# EAGLE board BOARD (EAGLE 9.7.0)
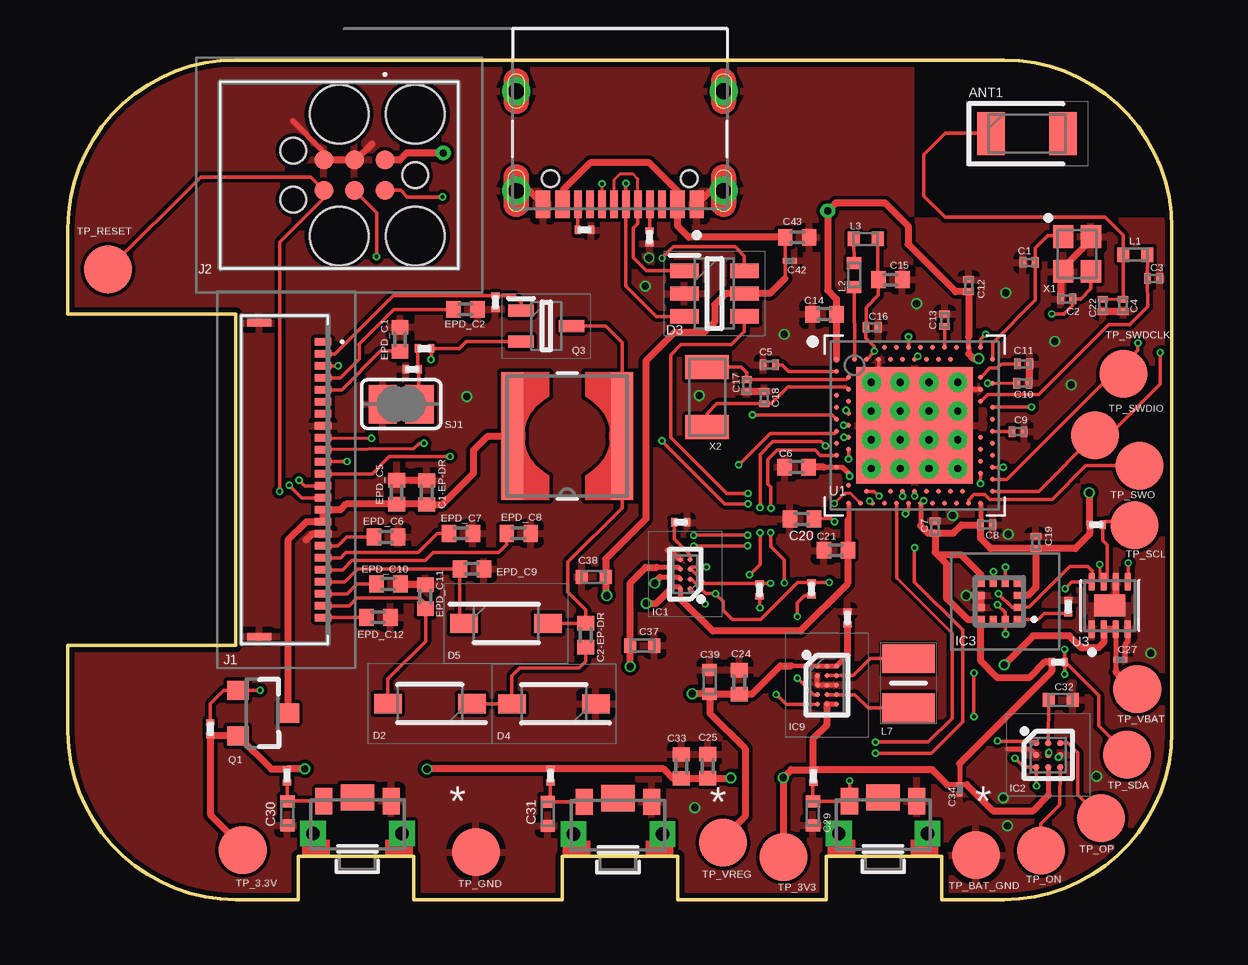
[diagram p0: board, top side]
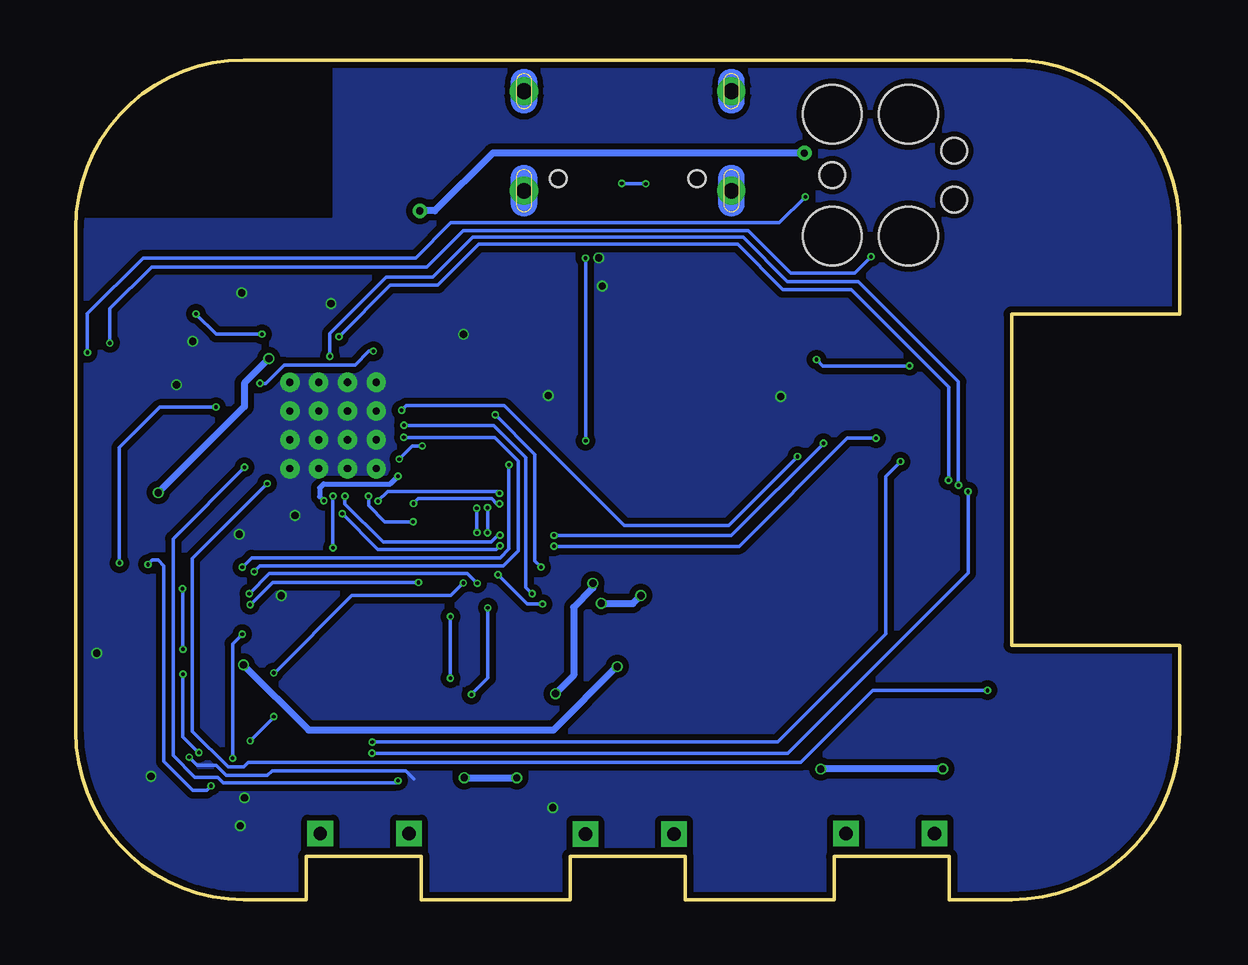
[diagram p1: board, bottom side, seen from below]

Size 46 x 35 mm. Coordinates in mm from the lower left corner, seen from the top.
Outline: 39,0 36.4,0 36.4,1.8 31.6,1.8 31.6,0 25.4,0 25.4,1.8 20.6,1.8 20.6,0 14.4,0 14.4,1.8 9.6,1.8 9.6,0 7,0 arc-90 0,7 0,10.6 7,10.6 7,24.4 0,24.4 0,28 arc-90 7,35 39,35 arc-90 46,28 46,7 arc-90 39,0
Copper layers (1*16): Top 0.035mm / dielectric 1.6mm / Bottom 0.035mm
Design rules "jlcpcb-2layers.dru": minimum track width 5mil, minimum drill 0.15mm, track to track 5mil, track to pad 5mil, pad to pad 5mil, via to via 5mil, smd to smd 5mil, copper to edge 0.2mm, drill to drill 6mil, minimum pad ring 10mil, minimum via ring 3mil, stop-mask expansion 4mil, vias tented up to drill 0mil, thermal gap 10mil

## Footprints (pad centres in the part's own frame; a part is rotated, then mirrored left to right if it is on the bottom)
2450AT18B100E_ANTC3216X140N = smd 1.15 x 1.8: 1 -1.5,0; 2 1.5,0
NORDIC_NRF_3_RESC0201_L = smd 0.28 x 0.43: 1 -0.255,0; 2 0.255,0
PERFECT_0402_0402 = smd 0.6 x 0.7: 1 -0.5,0; 2 0.5,0
GRM011R60J152KE01L_1_0201 = smd 0.35 x 0.25: 1 0,0.275; 2 0,-0.275
GRM011R60J152KE01L_2_CAPC0201X13N = smd 0.22 x 0.23: 1 -0.185,0; 2 0.185,0
NORDIC_NRF_3_RESC0402_L = smd 0.5 x 0.6: 1 -0.5,0; 2 0.5,0
ESP32_C6_LIBRARY_5_SOD3716X135N = smd 1.15 x 0.8: 1 -1.75,0; 2 1.75,0
ESP32_C6_LIBRARY_3_SOT95P280X145-6N = smd 1.2 x 0.6: 1 -1.25,0.95; 2 -1.25,0; 3 -1.25,-0.95; 4 1.25,-0.95; 5 1.25,0; 6 1.25,0.95
BQ25180YBGR_BGA8C40P2X4_100X155X50 = smd 0.2 x 0.2: A1 -0.2,0.6; A2 0.2,0.6; B1 -0.2,0.2; B2 0.2,0.2; C1 -0.2,-0.2; C2 0.2,-0.2; D1 -0.2,-0.6; D2 0.2,-0.6
DRV2605YZFR_BGA9C50P3X3_144X144X62 = smd 0.25 x 0.25: A1 -0.5,0.5; A2 0,0.5; A3 0.5,0.5; B1 -0.5,0; B2 0,0; B3 0.5,0; C1 -0.5,-0.5; C2 0,-0.5; C3 0.5,-0.5
BMA423_BMA423 = smd 0.3 x 0.35: 1 -0.75,-0.775; 2 -0.25,-0.775; 3 0.25,-0.775; 4 0.75,-0.775; 7 0.75,0.775; 8 0.25,0.775; 9 -0.25,0.775; 10 -0.75,0.775 | smd 0.35 x 0.3: 5 0.775,-0.25; 6 0.775,0.25; 11 -0.775,0.25; 12 -0.775,-0.25
RT6160AWSC_BGA15C40P3X5_140X230X60 = smd 0.216 x 0.216: A1 -0.4,0.8; A2 0,0.8; A3 0.4,0.8; B1 -0.4,0.4; B2 0,0.4; B3 0.4,0.4; C1 -0.4,0; C2 0,0; C3 0.4,0; D1 -0.4,-0.4; D2 0,-0.4; D3 0.4,-0.4; E1 -0.4,-0.8; E2 0,-0.8; E3 0.4,-0.8
503480-2400_5034802400 = smd 0.3 x 0.7: 1 -5.75,1.525; 2 -5.25,1.525; 3 -4.75,1.525; 4 -4.25,1.525; 5 -3.75,1.525; 6 -3.25,1.525; 7 -2.75,1.525; 8 -2.25,1.525; 9 -1.75,1.525; 10 -1.25,1.525; 11 -0.75,1.525; 12 -0.25,1.525; 13 0.25,1.525; 14 0.75,1.525; 15 1.25,1.525; 16 1.75,1.525; 17 2.25,1.525; 18 2.75,1.525; 19 3.25,1.525; 20 3.75,1.525; 21 4.25,1.525; 22 4.75,1.525; 23 5.25,1.525; 24 5.75,1.525 | smd 0.3 x 1: MP1 -6.54,-1.125; MP2 6.54,-1.125
TC2030-IDC_TC2030IDC = smd 0.783 x 0.783: 1 -0.953,-0.635; 2 -0.953,0.635; 3 0.317,-0.635; 4 0.317,0.635; 5 1.588,-0.635; 6 1.588,0.635 | hole 2.451: -2.223,-2.54; -2.223,2.54; 0.952,-2.54; 0.952,2.54 | hole 1.067: -2.223,0; 2.857,-1.016; 2.857,1.016
KH-TYPE-C-16P_KINGHELM_KH-TYPE-C-16P = smd 0.6 x 1.15: A1_B12 -3.2,4.725; A4_B9 -2.4,4.725; A9_B4 2.4,4.725; A12_B1 3.2,4.725 | smd 0.3 x 1.15: A5 -1.25,4.725; A6 -0.25,4.725; A7 0.25,4.725; A8 1.25,4.725; B5 1.75,4.725; B6 0.75,4.725; B7 -0.75,4.725; B8 -1.75,4.725 | drill 0.65 pad 1.05: SH1 -4.32,0; SH2 4.32,0; SH3 -4.32,4.15; SH4 4.32,4.15 | hole 0.7: -2.89,3.65; 2.89,3.65
NORDIC_NRF_2_RESC0402_L = smd 0.5 x 0.6: 1 -0.5,0; 2 0.5,0
ESP32_C6_LIBRARY_2_IND_4828-WE-TPC_WRE = smd 0.9 x 5.3: 1 -2.286,0; 2 2.286,0
MLP2016SR47MT0S1_INDC2016X100N = smd 1.2 x 2.2: 1 -1.028,0; 2 1.028,0
ESP32_C6_LIBRARY_4_ESP32_C6_LIBRARY_4_ESP32_C6_LIBRARY_4_ESP32_C6_LIBRARY_4_ESP32_WROVER_SPARKFUN-DISCRETESEMI_SOT23-3 = smd 0.8 x 0.9: 1 -0.95,-1; 2 0.95,-1; 3 0,1.1
ESP32_C6_LIBRARY_6_SOT65P210X110-3N = smd 1.05 x 0.5: 1 -1.05,0.65; 2 -1.05,-0.65; 3 1.05,0
ERA-1AEB3401C_0201 = smd 0.35 x 0.25: 1 0,0.275; 2 0,-0.275
CPF0201D7K68C1_0201 = smd 0.35 x 0.25: 1 0,0.275; 2 0,-0.275
ESP32_C6_LIBRARY_7_JUMPER_SJ = smd 1.168 x 1.6: 1 -0.762,0; 2 0.762,0
2025-10-22_07-23-44_LIBRARY_SW_EVP-AKE31A_PAN = smd 0.711 x 1.092: 1 -1.4,-0.972; 2 1.4,-0.972 | drill 0.559 pad 0.914 square: 3 -1.848,0.381; 4 1.848,0.381 | smd 1.397 x 1.092: 5 0,-1.124
HECTOR_WATCH_1_TP20R = smd 2 x 2: TP 0,0
NORDIC_NRF_4_AQFN50P700X700X85_HS-74N = smd 4.85 x 4.85: P$74 0,0 | drill 0.3 pad 0.6: P$75 -1.8,1.8; P$76 -0.6,1.8; P$77 0.6,1.8; P$78 1.8,1.8; P$79 -1.8,0.6; P$80 -0.6,0.6; P$81 0.6,0.6; P$82 1.8,0.6; P$83 -1.8,-0.6; P$84 -0.6,-0.6; P$85 0.6,-0.6; P$86 1.8,-0.6; P$87 -1.8,-1.8; P$88 -0.6,-1.8; P$89 0.6,-1.8; P$90 1.8,-1.8 | smd 0.2 x 0.2: P$A8 -1.25,3.25; P$A10 -0.75,3.25; P$A12 -0.25,3.25; P$A14 0.25,3.25; P$A16 0.75,3.25; P$A18 1.25,3.25; P$A20 1.75,3.25; P$A22 2.25,3.25; P$A23 2.75,3.25; P$AA24 3.25,-2.25; P$AB2 -2.75,-2.5; P$AC5 -2,-2.75; P$AC9 -1,-2.75; P$AC11 -0.5,-2.75; P$AC13 0,-2.75; P$AC15 0.5,-2.75; P$AC17 1,-2.75; P$AC19 1.5,-2.75; P$AC21 2,-2.75; P$AC24 3.25,-2.75; P$AD2 -2.75,-3.25; P$AD4 -2.25,-3.25; P$AD6 -1.75,-3.25; P$AD8 -1.25,-3.25; P$AD10 -0.75,-3.25; P$AD12 -0.25,-3.25; P$AD14 0.25,-3.25; P$AD16 0.75,-3.25; P$AD18 1.25,-3.25; P$AD20 1.75,-3.25; P$AD22 2.25,-3.25; P$AD23 2.75,-3.25; P$B1 -3.25,2.75; P$B3 -2.5,2.75; P$B5 -2,2.75; P$B7 -1.5,2.75; P$B9 -1,2.75; P$B11 -0.5,2.75; P$B13 0,2.75; P$B15 0.5,2.75; P$B17 1,2.75; P$B19 1.5,2.75; P$B24 3.25,2.75; P$C1 -3.25,2.25; P$D2 -2.75,2; P$D23 2.75,2; P$E24 3.25,1.75; P$F2 -2.75,1.5; P$F23 2.75,1.5; P$G1 -3.25,1.25; P$H2 -2.75,1; P$H23 2.75,1; P$J1 -3.25,0.75; P$J24 3.25,0.75; P$K2 -2.75,0.5; P$L1 -3.25,0.25; P$L24 3.25,0.25; P$M2 -2.75,0; P$N1 -3.25,-0.25; P$N24 3.25,-0.25; P$P2 -2.75,-0.5; P$P23 2.75,-0.5; P$R1 -3.25,-0.75; P$R24 3.25,-0.75; P$T2 -2.75,-1; P$T23 2.75,-1; P$U1 -3.25,-1.25; P$U24 3.25,-1.25; P$V23 2.75,-1.5; P$W1 -3.25,-1.75; P$W24 3.25,-1.75; P$Y2 -2.75,-2; P$Y23 2.75,-2
ESP32_C6_LIBRARY_SON50P200X200X80-9N = smd 0.76 x 0.27: 1 -0.985,0.75; 2 -0.985,0.25; 3 -0.985,-0.25; 4 -0.985,-0.75; 5 0.985,-0.75; 6 0.985,-0.25; 7 0.985,0.25; 8 0.985,0.75 | smd 0.9 x 1.3: 9 0,0
NORDIC_NRF_BT-XTAL_2016_N = smd 0.95 x 0.85: 1 -0.725,-0.575; 2 0.725,-0.575; 3 0.725,0.575; 4 -0.725,0.575
NORDIC_NRF_1_XTAL_3215_N = smd 1 x 1.8: 1 -1.25,0; 2 1.25,0

## Placement (x,y rotation side)
ANT1  2450AT18B100E_2450AT18B100E  [2450AT18B100E_ANTC3216X140N]  39.97,31.93 0 top
C1  12pF  [NORDIC_NRF_3_RESC0201_L]  40.05,26.56 180 top
C1-EP-DR  10uF  [PERFECT_0402_0402]  14.95,16.97 90 top
C2  12pF  [NORDIC_NRF_3_RESC0201_L]  41.61,25.04 180 top
C2-EP-DR  4.7uF/25V  [PERFECT_0402_0402]  21.57,11.01 90 top
C3  1pF  [NORDIC_NRF_3_RESC0201_L]  45.23,25.89 0 top
C4  1pF  [NORDIC_NRF_3_RESC0201_L]  43.96,24.77 270 top
C5  100nF  [NORDIC_NRF_3_RESC0201_L]  29.22,22.29 180 top
C6  4.7uF  [PERFECT_0402_0402]  30.36,18.02 180 top
C7  100nF  [NORDIC_NRF_3_RESC0201_L]  36.13,15.53 90 top
C8  100nF  [NORDIC_NRF_3_RESC0201_L]  38.28,15.62 0 top
C9  820pF N.C.  [NORDIC_NRF_3_RESC0201_L]  39.59,19.51 0 top
C10  N.C.  [NORDIC_NRF_3_RESC0201_L]  39.79,21.53 0 top
C11  100pF  [NORDIC_NRF_3_RESC0201_L]  39.82,22.33 0 top
C12  100nF  [NORDIC_NRF_3_RESC0201_L]  37.53,25.59 90 top
C13  N.C.  [NORDIC_NRF_3_RESC0201_L]  36.53,24.15 90 top
C14  4.7uF  [PERFECT_0402_0402]  31.52,24.4 180 top
C15  1.0uF  [PERFECT_0402_0402]  34.27,25.84 0 top
C16  47nF  [NORDIC_NRF_3_RESC0201_L]  33.51,23.85 0 top
C17  12pF  [NORDIC_NRF_3_RESC0201_L]  28.28,21.42 90 top
C18  12pF  [NORDIC_NRF_3_RESC0201_L]  29.01,20.93 270 top
C19  100nF  [NORDIC_NRF_3_RESC0201_L]  40.33,14.89 90 top
C20  4.7uF  [PERFECT_0402_0402]  30.58,15.86 180 top
C21  4.7uF  [PERFECT_0402_0402]  32,14.56 180 top
C22  N.C.  [NORDIC_NRF_3_RESC0201_L]  43.12,24.76 270 top
C23  0.1uF  [GRM011R60J152KE01L_1_0201]  32.48,11.74 0 top
C24  10uF  [PERFECT_0402_0402]  27.97,9.06 270 top
C25  22uF  [PERFECT_0402_0402]  26.66,5.56 90 top
C27  0.1uF  [GRM011R60J152KE01L_2_CAPC0201X13N]  43.85,9.99 180 top
C29  1uF  [NORDIC_NRF_3_RESC0402_L]  31.04,3.6 90 top
C30  1uF  [NORDIC_NRF_3_RESC0402_L]  9.14,3.59 90 top
C31  1uF  [NORDIC_NRF_3_RESC0402_L]  19.99,3.57 90 top
C32  1uF  [NORDIC_NRF_3_RESC0402_L]  41.37,8.32 180 top
C33  22uF  [PERFECT_0402_0402]  25.55,5.55 90 top
C34  0.1uF  [GRM011R60J152KE01L_2_CAPC0201X13N]  37.16,4.59 90 top
C37  1uF  [NORDIC_NRF_3_RESC0402_L]  23.93,10.59 180 top
C38  1uF  [NORDIC_NRF_3_RESC0402_L]  21.91,13.45 0 top
C39  10uF  [NORDIC_NRF_3_RESC0402_L]  26.74,9.07 270 top
C42  0.1uF  [GRM011R60J152KE01L_2_CAPC0201X13N]  30.08,26.63 180 top
C43  4.7uF  [PERFECT_0402_0402]  30.39,27.61 0 top
D2  MBR0530  [ESP32_C6_LIBRARY_5_SOD3716X135N]  15.08,8.17 180 top
D3  USBLC6-2SC6Y  [ESP32_C6_LIBRARY_3_SOT95P280X145-6N]  26.94,25.26 0 top
D4  MBR0530  [ESP32_C6_LIBRARY_5_SOD3716X135N]  20.24,8.16 180 top
D5  MBR0530  [ESP32_C6_LIBRARY_5_SOD3716X135N]  18.25,11.52 0 top
EPD_C1  1uF/50V  [PERFECT_0402_0402]  13.84,23.36 270 top
EPD_C2  1uF/50V  [PERFECT_0402_0402]  16.57,24.6 180 top
EPD_C5  1uF/50V  [PERFECT_0402_0402]  13.69,16.98 270 top
EPD_C6  1uF/50V  [PERFECT_0402_0402]  13.26,15.11 180 top
EPD_C7  1uF/50V  [PERFECT_0402_0402]  16.37,15.26 180 top
EPD_C8  1uF/50V  [PERFECT_0402_0402]  18.79,15.26 180 top
EPD_C9  1uF/50V  [PERFECT_0402_0402]  16.83,13.78 180 top
EPD_C10  1uF/50V  [PERFECT_0402_0402]  13.35,13.16 180 top
EPD_C11  1uF/50V  [PERFECT_0402_0402]  14.9,12.63 270 top
EPD_C12  1uF/50V  [PERFECT_0402_0402]  12.93,11.77 180 top
IC1  BQ25180YBGR  [BQ25180YBGR_BGA8C40P2X4_100X155X50]  25.72,13.56 180 top
IC2  DRV2605YZFR  [DRV2605YZFR_BGA9C50P3X3_144X144X62]  40.85,6.03 0 top
IC3  BMA423  [BMA423_BMA423]  38.81,12.43 90 top
IC9  RT6160AWSC  [RT6160AWSC_BGA15C40P3X5_140X230X60]  31.62,8.94 0 top
J1  503480-2400  [503480-2400_5034802400]  9.1,17.5 270 top
J2  TC2030-IDC  [TC2030-IDC_TC2030IDC]  12.25,30.2 180 top
J4  KH-TYPE-C-16P  [KH-TYPE-C-16P_KINGHELM_KH-TYPE-C-16P]  23,33.7 180 top
L1  3.9nH  [NORDIC_NRF_2_RESC0402_L]  44.47,26.88 180 top
L2  10uH  [NORDIC_NRF_2_RESC0402_L]  32.76,26.02 90 top
L3  15nH  [NORDIC_NRF_2_RESC0402_L]  33.25,27.54 0 top
L5  68 uH  [ESP32_C6_LIBRARY_2_IND_4828-WE-TPC_WRE]  20.8,19.32 180 top
L7  FTC252012SR47MBCA  [MLP2016SR47MT0S1_INDC2016X100N]  35.02,9.02 270 top
Q1  DMG2305UX-7 20V/4.2A/52mΩ/1.4W  [ESP32_C6_LIBRARY_4_ESP32_C6_LIBRARY_4_ESP32_C6_LIBRARY_4_ESP32_C6_LIBRARY_4_ESP32_WROVER_SPARKFUN-DISCRETESEMI_SOT23-3]  8.08,7.77 270 top
Q3  SI1308EDL-T1-GE3  [ESP32_C6_LIBRARY_6_SOT65P210X110-3N]  19.93,23.91 0 top
R1_EP_DR  0.47  [ERA-1AEB3401C_0201]  14.86,22.97 90 top
R1_USB  5K1  [CPF0201D7K68C1_0201]  24.23,27.62 180 top
R2  0  [ERA-1AEB3401C_0201]  28.82,12.91 0 top
R2_EP_DR  10K  [ERA-1AEB3401C_0201]  17.81,24.9 180 top
R2_USB  5K1  [CPF0201D7K68C1_0201]  21.52,27.91 90 top
R3  0  [CPF0201D7K68C1_0201]  41.68,12.21 0 top
R4  0  [ERA-1AEB3401C_0201]  30.99,12.95 0 top
R5  10k  [CPF0201D7K68C1_0201]  9.13,5.17 180 top
R7  10k  [CPF0201D7K68C1_0201]  31.06,5.13 180 top
R8  10k  [CPF0201D7K68C1_0201]  20.11,5.17 180 top
R9  10K  [ERA-1AEB3401C_0201]  25.53,15.73 270 top
R17  3K3  [ERA-1AEB3401C_0201]  42.85,15.63 90 top
R18  3K3  [ERA-1AEB3401C_0201]  41.26,9.9 90 top
R_PWR_EPD  10K  [CPF0201D7K68C1_0201]  5.93,7.12 0 top
R_TYPE_SEL  2.2  [ERA-1AEB3401C_0201]  14.35,22.11 90 top
SJ1  0  [ESP32_C6_LIBRARY_7_JUMPER_SJ]  13.89,20.65 0 top
SW_DN  2025-10-22_07-23-44_LIBRARY_EVP-AKE31ASW_EVP-AKE31A_PAN  [2025-10-22_07-23-44_LIBRARY_SW_EVP-AKE31A_PAN]  33.96,3.13 180 top
SW_ENT  2025-10-22_07-23-44_LIBRARY_EVP-AKE31ASW_EVP-AKE31A_PAN  [2025-10-22_07-23-44_LIBRARY_SW_EVP-AKE31A_PAN]  22.92,3.1 180 top
SW_UP  2025-10-22_07-23-44_LIBRARY_EVP-AKE31ASW_EVP-AKE31A_PAN  [2025-10-22_07-23-44_LIBRARY_SW_EVP-AKE31A_PAN]  12.06,3.14 180 top
TP_3.3V  HECTOR_WATCH_1_TPTP20R  [HECTOR_WATCH_1_TP20R]  7.28,2.07 0 top
TP_3V3  HECTOR_WATCH_1_TPTP20R  [HECTOR_WATCH_1_TP20R]  29.81,1.78 0 top
TP_BAT_GND  HECTOR_WATCH_1_TPTP20R  [HECTOR_WATCH_1_TP20R]  37.83,1.85 0 top
TP_GND  HECTOR_WATCH_1_TPTP20R  [HECTOR_WATCH_1_TP20R]  16.99,1.98 0 top
TP_ON  HECTOR_WATCH_1_TPTP20R  [HECTOR_WATCH_1_TP20R]  40.54,2.04 0 top
TP_OP  HECTOR_WATCH_1_TPTP20R  [HECTOR_WATCH_1_TP20R]  43.04,3.4 0 top
TP_RESET  HECTOR_WATCH_1_TPTP20R  [HECTOR_WATCH_1_TP20R]  1.67,26.26 180 top
TP_SCL  HECTOR_WATCH_1_TPTP20R  [HECTOR_WATCH_1_TP20R]  44.45,15.61 0 top
TP_SDA  HECTOR_WATCH_1_TPTP20R  [HECTOR_WATCH_1_TP20R]  44.13,6.04 0 top
TP_SWDCLK  HECTOR_WATCH_1_TPTP20R  [HECTOR_WATCH_1_TP20R]  43.98,21.92 0 top
TP_SWDIO  HECTOR_WATCH_1_TPTP20R  [HECTOR_WATCH_1_TP20R]  42.79,19.36 0 top
TP_SWO  HECTOR_WATCH_1_TPTP20R  [HECTOR_WATCH_1_TP20R]  44.66,18.09 0 top
TP_VBAT  HECTOR_WATCH_1_TPTP20R  [HECTOR_WATCH_1_TP20R]  44.55,8.76 0 top
TP_VREG  HECTOR_WATCH_1_TPTP20R  [HECTOR_WATCH_1_TP20R]  27.29,2.38 0 top
U1  NRF52840_QF  [NORDIC_NRF_4_AQFN50P700X700X85_HS-74N]  35.28,19.77 0 top
U3  MAX17048G+T10  [ESP32_C6_LIBRARY_SON50P200X200X80-9N]  43.41,12.26 90 top
X1  32MHz  [NORDIC_NRF_BT-XTAL_2016_N]  42.05,26.91 270 top
X2  32.768kHz  [NORDIC_NRF_1_XTAL_3215_N]  26.63,20.94 270 top

## Library data of the parts
ANT1 = InkTime_v5.lbr; ARROW_PART_NUMBER: 2450AT18B100E; ARROW_PRICE-STOCK: https://www.arrow.com/en/products/2450at18b100e/johanson-dielectrics?utm_currency=USD&region=nac; DESCRIPTION: Antennas 2.45GHz ANTENNA; HEIGHT: 1.4mm; MANUFACTURER_NAME: JOHANSON TECHNOLOGY; MANUFACTURER_PART_NUMBER: 2450AT18B100E; MOUSER_PART_NUMBER: 609-2450AT18B100E; MOUSER_PRICE-STOCK: https://www.mouser.co.uk/ProductDetail/Johanson-Technology/2450AT18B100E?qs=yCnrNFeXz%252Bh5MFsFIXGZGA%3D%3D
C1 C1-EP-DR C2 C2-EP-DR C3-C25 C29-C33 C37-C39 C43 EPD_C1 EPD_C2 EPD_C5-EPD_C12 L1-L3 R1_EP_DR R1_USB R2 R2_EP_DR R2_USB R3-R5 R7-R9 R17 R18 R_PWR_EPD R_TYPE_SEL SJ1 TP_3.3V TP_3V3 TP_BAT_GND TP_GND TP_ON TP_OP TP_RESET TP_SCL TP_SDA TP_SWDCLK TP_SWDIO TP_SWO TP_VBAT TP_VREG U1 X1 X2 = InkTime_v5.lbr
C27 C34 C42 = InkTime_v5.lbr; AVAILABILITY: In Stock; CHECK_PRICES: https://www.snapeda.com/parts/GRM011R60J152KE01L/Murata/view-part/?ref=eda; DESCRIPTION: SMD Capacitor X5R(EIA) with Capacitance: 1500pF Tol. 10%. Rated Voltage: 6.3Vdc; MF: Murata; MP: GRM011R60J152KE01L; PACKAGE: 0201 Murata; PRICE: None; SNAPEDA_LINK: https://www.snapeda.com/parts/GRM011R60J152KE01L/Murata/view-part/?ref=snap
D2 D4 D5 = InkTime_v5.lbr; AVAILABILITY: In Stock; CHECK_PRICES: https://www.snapeda.com/parts/MBR0530/Onsemi/view-part/?ref=eda; DESCRIPTION: Diode Schottky 30 V 500mA Surface Mount SOD-123; MF: ON Semiconductor; MP: MBR0530; PACKAGE: SOD-123-2 ON Semiconductor; PRICE: None; PURCHASE-URL: https://www.snapeda.com/api/url_track_click_mouser/?unipart_id=179458&manufacturer=ON Semiconductor&part_name=MBR0530&search_term=None; SNAPEDA_LINK: https://www.snapeda.com/parts/MBR0530/Onsemi/view-part/?ref=snap
D3 = InkTime_v5.lbr; AVAILABILITY: In Stock; CHECK_PRICES: https://www.snapeda.com/parts/USBLC6-2SC6Y/STMicroelectronics/view-part/?ref=eda; DESCRIPTION: 17V Clamp 5A (8/20µs) Ipp Tvs Diode Surface Mount SOT-23-6; MF: STMicroelectronics; MP: USBLC6-2SC6Y; PACKAGE: SOT-23-6 STMicroelectronics; PRICE: None; SNAPEDA_LINK: https://www.snapeda.com/parts/USBLC6-2SC6Y/STMicroelectronics/view-part/?ref=snap
IC1 = InkTime_v5.lbr; ARROW_PART_NUMBER: BQ25180YBGR; ARROW_PRICE-STOCK: https://www.arrow.com/en/products/bq25180ybgr/texas-instruments?utm_currency=USD&region=nac; DESCRIPTION: Charger IC Lithium Ion/Polymer, Lithium Iron Phosphate 8-DSBGA (1.6x1.1); HEIGHT: 0.5mm; MANUFACTURER_NAME: Texas Instruments; MANUFACTURER_PART_NUMBER: BQ25180YBGR; MOUSER_PART_NUMBER: 595-BQ25180YBGR; MOUSER_PRICE-STOCK: https://www.mouser.co.uk/ProductDetail/Texas-Instruments/BQ25180YBGR?qs=doiCPypUmgEWjAK%252BJAX6Tw%3D%3D
IC2 = InkTime_v5.lbr; ARROW_PART_NUMBER: DRV2605YZFR; ARROW_PRICE-STOCK: https://www.arrow.com/en/products/drv2605yzfr/texas-instruments?region=nac; DESCRIPTION: Haptic Driver for ERM/LRA with Built-In Library and Smart Loop Architecture; HEIGHT: 0.625mm; MANUFACTURER_NAME: Texas Instruments; MANUFACTURER_PART_NUMBER: DRV2605YZFR
IC3 = InkTime_v5.lbr; ARROW_PART_NUMBER: BMA423; ARROW_PRICE-STOCK: https://www.arrow.com/en/products/bma423/bosch; DESCRIPTION: Accelerometers Triaxial low-g 12bit Acceleration Sensor; HEIGHT: 1mm; MANUFACTURER_NAME: BOSCH; MANUFACTURER_PART_NUMBER: BMA423; MOUSER_PART_NUMBER: 262-BMA423; MOUSER_PRICE-STOCK: https://www.mouser.co.uk/ProductDetail/Bosch-Sensortec/BMA423?qs=HXFqYaX1Q2xC%252BSgeGoX3mg%3D%3D
IC9 = InkTime_v5.lbr; DESCRIPTION: Buck-Boost Regulator Positive Output Step-Up/Step-Down I2C DC-DC Controller IC 15-WL-CSP (BSC) (1.4x2.3); HEIGHT: 0.6mm; MANUFACTURER_NAME: RICHTEK; MANUFACTURER_PART_NUMBER: RT6160AWSC; MOUSER_PART_NUMBER: 835-RT6160AWSC; MOUSER_PRICE-STOCK: https://www.mouser.co.uk/ProductDetail/Richtek/RT6160AWSC?qs=amGC7iS6iy%2FLd9PSoixZXQ%3D%3D
J1 = InkTime_v5.lbr; DESCRIPTION: FFC & FPC Connectors 0.5mm FPC RA SMT Dual Contact 24Ckt; HEIGHT: 1.87mm; MANUFACTURER_NAME: Molex; MANUFACTURER_PART_NUMBER: 503480-2400; MOUSER_PART_NUMBER: 538-503480-2400; MOUSER_PRICE-STOCK: https://www.mouser.co.uk/ProductDetail/Molex/503480-2400?qs=OAhjpuo3Vu7efIoxFh9AOw%3D%3D
J2 = InkTime_v5.lbr; DESCRIPTION: CABLE ADAPTER 6 POS; HEIGHT: 19mm; MANUFACTURER_NAME: Tag Connect; MANUFACTURER_PART_NUMBER: TC2030-IDC
J4 = InkTime_v5.lbr; AVAILABILITY: Not in stock; CHECK_PRICES: https://www.snapeda.com/parts/KH-TYPE-C-16P/Kinghelm/view-part/?ref=eda; MF: kinghelm; MP: KH-TYPE-C-16P; PACKAGE: None; PRICE: None; SNAPEDA_LINK: https://www.snapeda.com/parts/KH-TYPE-C-16P/Kinghelm/view-part/?ref=snap
L5 = InkTime_v5.lbr; COPYRIGHT: Copyright (C) 2024 Ultra Librarian. All rights reserved.; MANUFACTURER_PART_NUMBER: 744043680; MFR_NAME: Wurth Electronics
L7 = InkTime_v5.lbr; DESCRIPTION: SMD / SMT Inductors (Coils), L=0.47?H, L x W x T :; HEIGHT: 1mm; JLCPCB: https://jlcpcb.com/partdetail/6763488-FTC252012SR47MBCA/C5832368; MANUFACTURER_NAME: TDK; MANUFACTURER_PART_NUMBER: FTC252012SR47MBCA
Q1 = InkTime_v5.lbr; PROD_ID: TRAN-14388
Q3 = InkTime_v5.lbr; AVAILABILITY: In Stock; CHECK_PRICES: https://www.snapeda.com/parts/SI1308EDL-T1-GE3/Vishay+Siliconix/view-part/?ref=eda; DESCRIPTION: Si1308EDL-T1-GE3 N-channel MOSFET Transistor, 1.5 A, 30 V, 3-Pin SC-70 | Siliconix / Vishay SI1308EDL-T1-GE3; MF: Vishay Siliconix; MP: SI1308EDL-T1-GE3; PACKAGE: SOT-323 Vishay Semiconductor; PRICE: None; PURCHASE-URL: https://www.snapeda.com/api/url_track_click_mouser/?unipart_id=274603&manufacturer=Vishay Siliconix&part_name=SI1308EDL-T1-GE3&search_term=None; SNAPEDA_LINK: https://www.snapeda.com/parts/SI1308EDL-T1-GE3/Vishay+Siliconix/view-part/?ref=snap
SW_DN SW_ENT SW_UP = InkTime_v5.lbr; COPYRIGHT: Copyright (C) 2025 Ultra Librarian. All rights reserved.; DIGI-KEY_PART_NUMBER_1: P123437TR-ND; DIGI-KEY_PART_NUMBER_2: P123437CT-ND; DIGI-KEY_PART_NUMBER_3: P123437DKR-ND; MANUFACTURER_NAME: Panasonic; MANUFACTURER_PART_NUMBER: EVP-AKE31A
U3 = InkTime_v5.lbr; AVAILABILITY: In Stock; CHECK_PRICES: https://www.snapeda.com/parts/MAX17048G+T10/Analog+Devices/view-part/?ref=eda; DESCRIPTION: 3µA 1-Cell/2-Cell Fuel Gauge with ModelGauge; MF: Analog Devices; MP: MAX17048G+T10; PACKAGE: TDFN-8 Maxim; PRICE: None; PURCHASE-URL: https://www.snapeda.com/api/url_track_click_mouser/?unipart_id=329239&manufacturer=Analog Devices&part_name=MAX17048G+T10&search_term=None; SNAPEDA_LINK: https://www.snapeda.com/parts/MAX17048G+T10/Analog+Devices/view-part/?ref=snap

## Nets
3V3: C6.1 C7.1 C8.1 C12.1 C14.1 C19.1 C25.1 C33.1 C34.2 IC2.C2 IC3.3 IC3.7 IC3.10 IC9.E2 IC9.E3 J2.1 Q1.2 R5.2 R7.2 R8.2 R17.1 R18.1 R_PWR_EPD.2 TP_3.3V.TP TP_3V3.TP U1.P$A22 U1.P$AD14 U1.P$AD23 U1.P$B1 U1.P$W1 U1.P$Y2
ALERT: U1.P$J24 U3.5
D+: D3.4 U1.P$AD6
D-: D3.6 U1.P$AD4
DEC1: C5.1 U1.P$C1
DEC3: C11.1 U1.P$D23
DEC4_6: C10.1 C15.1 C16.1 L3.2 U1.P$B5 U1.P$E24
DN: D3.1 J4.A7 J4.B7
DP: D3.3 J4.A6 J4.B6
EPD_3V3: C1-EP-DR.1 EPD_C5.2 J1.15 J1.16 L5.2 Q1.3
EPD_BUSY: J1.9 U1.P$AD12
EPD_CS: J1.12 U1.P$K2
EPD_DC: J1.11 U1.P$AD10
EPD_RST: J1.10 U1.P$AC11
GDR: J1.2 Q3.1 R2_EP_DR.2
GND: C1-EP-DR.2 C1.2 C2.2 C3.2 C4.2 C5.2 C6.2 C7.2 C8.2 C9.2 C10.2 C11.2 C12.2 C13.2 C14.2 C15.2 C16.2 C17.1 C18.1 C19.2 C20.2 C21.2 C22.2 C23.1 C24.1 C25.2 C27.1 C29.1 C30.1 C31.1 C32.1 C33.2 C34.1 C37.1 C38.1 C39.1 C42.1 C43.2 D3.2 D4.1 EPD_C1.1 EPD_C2.1 EPD_C5.1 EPD_C6.1 EPD_C7.1 EPD_C8.1 EPD_C9.1 EPD_C10.1 EPD_C11.1 EPD_C12.1 IC1.D2 IC2.B1 IC2.B3 IC3.8 IC3.9 IC9.B1 IC9.C1 IC9.C2 IC9.C3 J1.8 J1.17 J1.MP1 J1.MP2 J2.3 J2.5 J4.A1_B12 J4.A12_B1 J4.SH1 J4.SH2 J4.SH3 J4.SH4 R1_USB.1 R2_EP_DR.1 R2_USB.2 R3.1 R9.1 R_TYPE_SEL.1 SJ1.1 SW_DN.1 SW_ENT.1 SW_UP.1 TP_BAT_GND.TP TP_GND.TP U1.P$74 U1.P$75 U1.P$76 U1.P$77 U1.P$78 U1.P$79 U1.P$80 U1.P$81 U1.P$82 U1.P$83 U1.P$84 U1.P$85 U1.P$86 U1.P$87 U1.P$88 U1.P$89 U1.P$90 U1.P$B7 U1.P$F23 U3.1 U3.4 U3.6 U3.9 X1.2 X1.4
HAPTIC_EN: IC2.A1 U1.P$U1
IMU_INT1: IC3.5 U1.P$N1
IMU_INT2: IC3.6 U1.P$P2
LX1: IC9.B2 IC9.B3 L7.1
LX2: IC9.D2 IC9.D3 L7.2
MOSI: J1.14 U1.P$B13
N$1: ANT1.1 C4.1 C22.1 L1.2
N$2: IC9.D1 R4.2
N$3: IC1.D1 R9.2
N$4: C2.1 U1.P$A23 X1.3
N$5: IC9.E1 R2.2
N$6: J4.A5 R1_USB.2
N$7: L2.2 L3.1
N$8: IC3.1 R3.2
N$9: C1.1 U1.P$B24 X1.1
N$10: C3.1 L1.1 U1.P$H23
N$11: C32.2 IC2.A2
N$13: C2-EP-DR.1 D2.1 D4.2
N$14: C9.1 U1.P$N24
N$15: R1_EP_DR.1 R_TYPE_SEL.2 SJ1.2
N$16: C2-EP-DR.2 D5.2 L5.1 Q3.3
N$17: EPD_C2.2 J1.4
N$18: EPD_C1.2 J1.5
N$20: C20.1 U1.P$AC5
N$22: L2.1 U1.P$B3
N$26: J4.B5 R2_USB.1
N$30: EPD_C6.2 J1.18
N$31: EPD_C7.2 J1.19
N$32: EPD_C8.2 J1.20
N$34: EPD_C10.2 J1.22
N$35: C13.1 U1.P$A18
N$37: EPD_C12.2 J1.24
OUT+: IC2.A3 TP_OP.TP
OUT-: IC2.C3 TP_ON.TP
P0.00/XL1: C17.2 U1.P$D2 X2.1
P0.01/XL2: C18.2 U1.P$F2 X2.2
P0.04: U1.P$J1
P0.09: U1.P$L24
P0.13: C30.2 R5.1 SW_UP.2
P0.14: C31.2 R8.1 SW_ENT.2
P0.19: U1.P$AC15
P0.20: U1.P$AD16
P0.21: U1.P$AC17
P0.22: U1.P$AD18
P0.23: U1.P$AC19
P0.24: U1.P$AD20
P0.25: U1.P$AC21
P0.26: U1.P$G1
P0.27: U1.P$H2
P0.28: U1.P$B11
P0.29: U1.P$A10
P0.30: U1.P$B9
P0.31: U1.P$A8
P1.01: Q1.1 R_PWR_EPD.1 U1.P$Y23
P1.02: C29.2 R7.1 SW_DN.2 U1.P$W24
P1.03: U1.P$V23
P1.04: U1.P$U24
P1.05: U1.P$T23
P1.06: U1.P$R24
P1.07: U1.P$P23
P1.09: U1.P$R1
P1.10: U1.P$A20
P1.11: U1.P$B19
P1.12: U1.P$B17
P1.13: U1.P$A16
P1.14: U1.P$B15
P1.15: U1.P$A14
PMIC_INT: IC1.A1 U1.P$T2
PO.13: U1.P$AD8
PO.14: U1.P$AC9
PREVGH: D5.1 EPD_C9.2 J1.21
PREVGL: D2.2 EPD_C11.2 J1.23
RESE: J1.3 Q3.2 R1_EP_DR.2
RESET: J2.6 TP_RESET.TP U1.P$AC13
SCK: J1.13 U1.P$A12
SCL: IC1.B1 IC2.C1 IC3.12 R4.1 R17.2 TP_SCL.TP U1.P$M2 U3.7
SDA: IC1.C1 IC2.B2 IC3.2 R2.1 R18.2 TP_SDA.TP U1.P$L1 U3.8
SWDCLK: J2.4 TP_SWDCLK.TP U1.P$AA24
SWDIO: J2.2 TP_SWDIO.TP U1.P$AC24
SWO: TP_SWO.TP U1.P$AD22
VBAT: C27.2 C37.2 IC1.C2 TP_VBAT.TP U3.2 U3.3
VBUS: C21.1 C38.2 C42.2 C43.1 D3.5 IC1.A2 J4.A4_B9 J4.A9_B4 U1.P$AD2
VREG: C23.2 C24.2 C39.2 IC1.B2 IC9.A1 IC9.A2 IC9.A3 TP_VREG.TP

## Tracks (layer width: path | path; a pad name or v marks a point on that pad's centre or on a via)
3V3  (via drill 0.15, 0.3, 0.3 pad 0.61)
  Top 0.127: 30.89,18.11 C6.1
  Top 0.203: IC9.E3 IC9.E2 | 37.53,23.46 U1.P$A22 37.53,22.75 | IC2.C2 40.85,4.34 | C34.2 36.64,4.78 | 37.15,5.67 C34.2 | 37.45,4.79 C34.2 | U1.P$AD23 C8.1 | 35.53,15.58 U1.P$AD14 35.64,16.62 v35.66,16.62 | 31.5,18.02 U1.P$W1 32.28,18.02 U1.P$Y2 32.57,17.72 v32.57,17.65
  Top 0.3: 29.87,1.84 TP_3V3.TP v29.81,5.08 30.14,5.41 R7.2 | TP_3.3V.TP 7.34,2.12 5.93,3.53 R_PWR_EPD.2 7.06,6.85 Q1.2 8.46,5.44 R5.2 v9.86,5.44 v9.87,5.45 | U1.P$B1 32.02,22.53 C14.1 32.02,25.04 31.66,25.4 v31.66,28.71 31.99,29.04 34.05,29.04 35.01,28.08 35.01,27.32 36.99,25.34 C12.1 37.53,23.46 | v15.64,31.12 v15.63,31.12 14.11,31.12 13.83,30.84 J2.1 | C25.1 | R8.2 | R8.2 24.82,5.44 25.22,5.04 C33.1 25.56,5.06 C25.1 | C25.1 v27.61,5.06 v27.62,5.07 | R7.2 31.06,6.72 31.63,7.29 IC9.E2 | 40.85,4.34 40.19,3.68 38.56,3.68 37.45,4.79 | 36.64,4.78 36.01,5.41 R7.2 | 37.15,5.67 40.98,9.5 R18.1 40.7,9.9 40.05,9.25 38.73,9.25 38.03,9.95 IC3.10 37.48,11.68 36.61,12.55 36.61,13.99 36.22,14.38 | 36.22,14.38 37.2,14.38 38.03,13.55 IC3.7 | C19.1 41.97,14.63 42.57,15.23 R17.1 42.57,16.95 v42.56,16.96 | C19.1 40.33,13 40.01,12.68 IC3.3 | C19.1 38.45,14.63 38.02,15.05 C8.1 37.24,15.62 36.89,15.27 C7.1 | C7.1 35.83,15.27 35.53,15.58 | C7.1 36.13,14.47 36.22,14.38 | v37.95,22.55 37.73,22.55 37.53,22.75 | 31.5,18.02 C6.1 | R8.2 v14.96,5.44
  Bottom 0.15: 35.84,16.8 v35.66,16.62
  Bottom 0.203: v32.57,17.65 32.89,17.33 35.67,17.33 35.84,17.16 35.84,16.8
  Bottom 0.3: v15.64,31.12 28.62,31.12 31.03,28.71 v31.66,28.71 | v29.81,5.08 v29.8,5.07 v27.62,5.07 | v37.95,22.55 38.97,21.53 38.97,20.55 v42.56,16.96 | v9.87,5.45 v14.95,5.45 v14.96,5.44
ALERT  (via drill 0.15 pad 0.3)
  Top 0.15: v44.18,14.03 44.18,13.26 U3.5 | v40.15,20.53 U1.P$J24
  Bottom 0.15: v40.15,20.53 42.49,20.53 44.18,18.84 v44.18,14.03
D+  (via drill 0.15)
  Top 0.15: D3.4 28.19,23.68 27.64,23.13 25.54,23.13 25.11,22.7 25.11,19.27 27.45,16.93 v28.34,16.93 | U1.P$AD6 33.5,16.52 v33.41,16.61
  Bottom 0.15: v33.41,16.61 33.01,17.01 28.42,17.01 v28.34,16.93
D-  (via drill 0.15, 0.15 pad 0.3)
  Top 0.127: U1.P$AD4 32.62,16.92 32.34,16.92 v31.93,16.51
  Top 0.15: D3.6 28.19,26.83 27.81,27.21 25.23,27.21 v24.76,26.74 | v24.75,19.13 v24.75,19.12 27.37,16.5 v28.34,16.5
  Bottom 0.15: v31.93,16.51 31.73,16.71 28.67,16.71 28.46,16.5 v28.34,16.5 | v24.76,26.74 v24.75,26.73 v24.75,19.13
DEC1
  Top 0.15: U1.P$C1 30.03,22.02 29.77,22.29 C5.1
DEC3
  Top 0.15: C11.1 38.91,22.33 38.73,22.15 38.41,22.15 U1.P$D23
DEC4_6  (via drill 0.15)
  Top 0.15: L3.2 33.73,25.88 C15.1 33.77,25.2 33.26,24.69 C16.1 33.24,23.87 33.24,23.41 33.6,23.05 v33.6,22.86 33.6,22.84 U1.P$B5 | C10.1 U1.P$E24 v38.32,21.52
  Bottom 0.15: v38.32,21.52 38.09,21.52 37.32,22.29 34.36,22.29 33.79,22.86 v33.6,22.86
DN
  Top 0.127: J4.B7 23.75,30.04 23.55,30.24 23,30.24 22.75,29.99 J4.A7
  Top 0.15: D3.1 24.1,26.21 23.55,26.76 23.55,27.98 23.75,28.19 J4.B7
DP  (via drill 0.15)
  Top 0.127: v22.25,29.84 J4.B6
  Top 0.15: D3.3 24.52,24.31 23.25,25.58 | v23.25,29.85 J4.A6
  Top 0.152: J4.A6 23.25,25.58
  Bottom 0.15: v23.25,29.85 v23.24,29.84 v22.25,29.84
EPD_3V3
  Top 0.3: Q1.3 9.16,7.79 9.16,14.98 9.93,15.75 J1.16 J1.15 11.35,16.25 11.58,16.48 EPD_C5.2 14.94,16.48 C1-EP-DR.1 15.59,16.47 16.89,17.77 16.89,18.72 17.5,19.32 L5.2
EPD_BUSY  (via drill 0.15, 0.15 pad 0.3)
  Top 0.127: U1.P$AD12
  Top 0.15: v12.65,19.23 J1.9 | U1.P$AD12 35.02,16.21 v34.89,16.09 | v28.32,14.75 26.09,14.75 v26.07,14.73
  Bottom 0.15: v34.89,16.09 33.41,14.6 28.48,14.6 v28.32,14.75 | v26.07,14.73 v26.07,14.72 18.36,14.72 13.85,19.23 v12.65,19.23
EPD_CS  (via drill 0.15, 0.15 pad 0.3)
  Top 0.15: v15.92,18.47 13.39,18.47 12.67,17.75 J1.12 | U1.P$K2 32.42,20.37 v32.42,20.4
  Bottom 0.15: v15.92,18.47 18.8,15.59 23.15,15.59 28.15,20.59 32.23,20.59 v32.42,20.4
EPD_DC  (via drill 0.15, 0.15 pad 0.3)
  Top 0.127: 36.84,11.09 34.53,13.4
  Top 0.15: v11.63,18.26 J1.11 | U1.P$AD10 34.53,13.4 | v33.64,6.56 35.86,6.56 36.84,7.55 36.84,11.09
  Bottom 0.15: v11.63,18.26 12.25,17.64 12.25,11.07 16.75,6.57 v33.64,6.57 v33.64,6.56
EPD_RST  (via drill 0.15, 0.15 pad 0.3)
  Top 0.15: v14.84,19.02 14.64,19.02 14.42,18.8 J1.10 | U1.P$AC11 v34.78,16.81 | v28.32,15.19 v26.08,15.19 v26.07,15.18
  Bottom 0.15: v14.84,19.02 18.68,15.18 v26.07,15.18 | v28.32,15.19 28.4,15.19 28.68,14.91 33.19,14.91 34.78,16.5 v34.78,16.81
GDR
  Top 0.15: J1.2 11.12,22.75 13.54,25.17 R2_EP_DR.2 18.6,25.17 18.88,24.89 Q3.1
GND  (via drill 0.15, 0.3)
  Top 0.127: 43.62,13.12 U3.6 | 24.38,3.88 24.25,4 SW_ENT.1 | 39.88,19.62 C9.2
  Top 0.15: IC2.B3 41.35,6.01 v41.27,5.93 | U1.P$B7 33.78,21.87 U1.P$75 | U1.P$74 U1.P$84
  Top 0.2: J2.5 10.66,31.16 9.36,32.47 | IC9.C3 IC9.C2 IC9.C1 IC9.B1 | IC1.D2 25.13,14.56 24.95,14.56 | IC2.B1 40.11,6.27 39.15,6.27 | U3.4 44.16,10.76 44.03,10.63 C27.1
  Top 0.203: U1.P$F23 37.38,21.27 U1.P$78
  Top 0.3: J2.5 J2.3 11.99,30.84 12.67,31.51 | IC3.9 IC3.8 38.02,12.67 v37.43,12.67 | C4.2 C22.2 | C2.2 41.36,26.07 X1.2 41.47,26.34 42.62,27.49 X1.4 | C10.2 40.07,21.55 C11.2 | J1.17 10.18,15.25 9.92,14.99 | C1-EP-DR.2 13.7,17.47 EPD_C5.1 | EPD_C11.1 13.88,13.13 EPD_C10.1 | J4.A1_B12 26.77,29.55 J4.SH3 | J4.A12_B1 19.23,29.55 J4.SH4 | C17.1 29,21.17 C18.1 28.98,21.21 | C5.2 28.98,22.27 | U3.6 43.66,12.51 U3.9
  Bottom 0.15: v41.27,5.93 40.93,5.59 40.14,5.59 39.72,5.17 38.01,5.17 37.81,5.37 32.25,5.37 31.92,5.04
  other vias: 39.15,3.07 39.18,15.23 24.06,25.57 24.21,26.75 16.62,20.97 26.12,3.83 36.86,16.01 41.12,23.27 41.8,21.46 39.08,25.29 35.36,24.85 29.84,23.56 26.31,21.01 38.97,4.24 45.12,10.27 42.86,5.14
  pour Bottom (isolate 0.254): 20.36,2.07 20.41,2.09 25.58,2.09 25.63,2.07 25.68,2.02 25.7,1.97 25.7,0.28 31.31,0.28 31.31,1.98 31.33,2.03 31.38,2.08 31.43,2.1 36.58,2.1 36.63,2.08 36.68,2.03 36.7,1.98 36.7,0.3 38.96,0.3 39.77,0.35 40.58,0.5 41.35,0.74 42.1,1.07 42.79,1.5 43.44,2 44.01,2.57 44.51,3.22 44.94,3.91 45.27,4.66 45.51,5.43 45.66,6.24 45.71,7.05 45.71,28.29 35.27,28.29 35.22,28.31 35.17,28.36 35.15,28.41 35.15,34.71 7.04,34.71 6.23,34.66 5.44,34.52 4.66,34.27 3.93,33.94 3.23,33.52 2.6,33.02 2.03,32.45 1.53,31.82 1.11,31.12 0.78,30.39 0.53,29.61 0.39,28.82 0.34,28.01 0.34,24.78 7.18,24.78 7.23,24.76 7.28,24.71 7.3,24.66 7.3,10.44 7.28,10.39 7.23,10.34 7.18,10.32 0.29,10.32 0.29,7.04 0.34,6.23 0.49,5.42 0.73,4.65 1.06,3.9 1.49,3.21 1.99,2.56 2.56,1.99 3.21,1.49 3.9,1.06 4.65,0.73 5.42,0.49 6.23,0.34 7.04,0.29 9.32,0.29 9.32,1.99 9.34,2.04 9.39,2.09 9.44,2.11 14.58,2.11 14.63,2.09 14.68,2.04 14.7,1.99 14.7,0.29 20.29,0.29 20.29,1.97 20.31,2.02
  pour Top (isolate 0.15): 20.35,2.08 20.4,2.1 25.57,2.1 25.62,2.08 25.67,2.03 25.69,1.98 25.69,0.29 31.3,0.29 31.3,1.99 31.32,2.04 31.37,2.09 31.42,2.11 36.57,2.11 36.62,2.09 36.67,2.04 36.69,1.99 36.69,0.31 38.95,0.31 39.76,0.36 40.57,0.51 41.34,0.75 42.09,1.08 42.78,1.51 43.43,2.01 44,2.58 44.5,3.23 44.93,3.92 45.26,4.67 45.5,5.44 45.65,6.25 45.7,7.06 45.7,28.28 35.26,28.28 35.21,28.3 35.16,28.35 35.14,28.4 35.14,34.72 7.03,34.72 6.22,34.67 5.43,34.53 4.65,34.28 3.92,33.95 3.22,33.53 2.59,33.03 2.02,32.46 1.52,31.83 1.1,31.13 0.77,30.4 0.52,29.62 0.38,28.83 0.33,28.02 0.33,24.79 7.17,24.79 7.22,24.77 7.27,24.72 7.29,24.67 7.29,10.45 7.27,10.4 7.22,10.35 7.17,10.33 0.28,10.33 0.28,7.05 0.33,6.24 0.48,5.43 0.72,4.66 1.05,3.91 1.48,3.22 1.98,2.57 2.55,2 3.2,1.5 3.89,1.07 4.64,0.74 5.41,0.5 6.22,0.35 7.03,0.3 9.31,0.3 9.31,2 9.33,2.05 9.38,2.1 9.43,2.12 14.57,2.12 14.62,2.1 14.67,2.05 14.69,2 14.69,0.3 20.28,0.3 20.28,1.98 20.3,2.03
HAPTIC_EN  (via drill 0.15)
  Top 0.15: U1.P$U1 31.36,18.52 31.13,18.74 29.56,18.74 29.16,18.34 29.16,17.32 29.29,17.19 v29.29,16.31 | IC2.A1 40.28,6.6 38.74,6.6 v38.73,6.62 | v29.85,13.2 29.85,14.15 29.28,14.72 v29.28,15.3 | v37.75,9.45 v37.75,7.62
  Bottom 0.15: v38.73,6.62 37.75,7.6 v37.75,7.62 | v29.85,13.2 30.38,12.67 34.49,12.67 37.72,9.45 v37.75,9.45 | v29.29,16.31 v29.29,15.31 v29.28,15.3
IMU_INT1  (via drill 0.15)
  Top 0.15: U1.P$N1 31.94,19.43 29.26,19.43 v27.95,18.12 | IC3.5 v39.06,13.85
  Bottom 0.15: v39.06,13.85 38.67,14.24 28.32,14.24 27.95,14.61 v27.95,18.12
IMU_INT2  (via drill 0.15)
  Top 0.15: IC3.6 v38.56,13.67 | U1.P$P2 v32.33,19.27
  Bottom 0.15: v38.56,13.67 38.33,13.9 28.19,13.9 27.56,14.53 27.56,18.29 28.54,19.27 v32.33,19.27
LX1
  Top 0.15: IC9.B2 IC9.B3 32.73,9.34 33.43,10.04 L7.1
LX2
  Top 0.15: IC9.D2 IC9.D3 32.79,8.54 33.34,7.99 L7.2
MOSI  (via drill 0.15, 0.15 pad 0.3)
  Top 0.127: v35.41,22.65
  Top 0.15: J1.14 9.74,16.75 v9.22,17.27 | U1.P$B13 v35.41,22.65
  Bottom 0.15: v9.22,17.27 9.22,21.59 13.4,25.77 16.35,25.77 18.19,27.61 29.45,27.61 31.12,25.94 33.07,25.94 35.41,23.6 v35.41,22.65
N$1
  Top 0.15: ANT1.1 38.45,31.95 36.55,31.95 35.66,31.06 35.66,29.33 36.55,28.44 43.23,28.44 43.97,27.7 L1.2 43.96,26.87 C4.1 C22.1
N$2  (via drill 0.15)
  Top 0.15: IC9.D1 31.08,8.54 v30.39,9.23 | R4.2 30.7,12.67 30.39,12.37 v30.39,11.8
  Bottom 0.15: v30.39,11.8 v30.39,9.23
N$3
  Top 0.15: IC1.D1 25.92,14.36 25.25,15.03 R9.2
N$4  (via drill 0.15 pad 0.3)
  Top 0.15: X1.3 42.62,25.46 42.2,25.04 C2.1 41.87,24.78 41.5,24.41 v40.99,24.41 | v38.24,23.57 | v38.24,23.57 38.03,23.36 U1.P$A23
  Bottom 0.15: v40.99,24.41 40.15,23.57 v38.24,23.57
N$5  (via drill 0.15)
  Top 0.15: IC9.E1 29.92,8.14 v29.51,8.55 | v28.83,12.16 28.82,12.18 R2.2
  Bottom 0.15: v28.83,12.16 28.83,9.23 v29.51,8.55
N$6
  Top 0.15: R1_USB.2 24.23,28.95 J4.A5
N$7
  Top 0.15: L3.1 L2.2
N$8
  Top 0.15: R3.2 40.68,11.93 40.42,11.67 IC3.1
N$9
  Top 0.15: X1.1 41.43,27.68 40.83,27.68 40.3,27.15 C1.1 40.3,24.98 38.53,23.21 U1.P$B24
N$10
  Top 0.15: U1.P$H23 38.32,21.05 40.46,21.05 43.38,23.97 44.25,23.97 44.99,24.71 C3.1 44.99,26.86 L1.1
N$11
  Top 0.15: C32.2 IC2.A2
N$13
  Top 0.15: D2.1 D4.2 18.49,9.33 18.83,9.66 21.3,9.66 21.57,9.93 C2-EP-DR.1
N$14
  Top 0.15: C9.1 U1.P$N24
N$15
  Top 0.15: SJ1.2 14.62,20.68 R_TYPE_SEL.2 14.58,22.15 R1_EP_DR.1
N$16
  Top 0.15: Q3.3 22.4,23.91 23.09,23.22 L5.1 23.09,16.32 20.83,14.06 20.83,12.82 21.57,12.07 C2-EP-DR.2 | C2-EP-DR.2 | C2-EP-DR.2 D5.2
N$17
  Top 0.15: J1.4 11.36,21.75 12.13,22.52 12.13,23.14 12.12,23.14 13.58,24.6 EPD_C2.2
N$18
  Top 0.15: J1.5 11.4,21.25 13.01,22.86 EPD_C1.2
N$20  (via drill 0.15)
  Top 0.15: U1.P$AC5 33.6,17.02 v33.8,16.82 | v31.94,15.75 31.8,15.89 31.06,15.89 C20.1
  Bottom 0.15: v31.94,15.75 33.13,15.75 33.8,16.42 v33.8,16.82
N$22
  Top 0.15: L2.1 U1.P$B3
N$26
  Top 0.15: R2_USB.1 J4.B5
N$30
  Top 0.15: J1.18 11.25,14.75 11.61,15.11 EPD_C6.2
N$31
  Top 0.15: J1.19 11.37,14.25 11.59,14.47 14.59,14.47 15.38,15.26 EPD_C7.2
N$32
  Top 0.15: J1.20 11.45,13.75 11.83,14.13 14.89,14.13 15.22,14.46 17.95,14.46 18.29,14.79 EPD_C8.2
N$34
  Top 0.15: J1.22 11.63,12.75 12.04,13.16 EPD_C10.2
N$35
  Top 0.15: U1.P$A18 C13.1
N$37
  Top 0.15: J1.24 10.64,11.77 EPD_C12.2
OUT+
  Top 0.15: TP_OP.TP 42.08,4.36 42.08,6.11 41.66,6.53 IC2.A3
OUT-
  Top 0.15: IC2.C3 41.33,3.94 40.54,3.15 TP_ON.TP
P0.00/XL1
  Top 0.15: U1.P$D2 32.44,21.68 C17.2 28.28,21.96 28.05,22.19 X2.1
P0.01/XL2
  Top 0.15: U1.P$F2 32.43,21.37 30,21.37 29.3,20.67 C18.2 27.04,20.67 26.63,20.26 X2.2
P0.13
  Top 0.15: SW_UP.2 9.16,4.11 C30.2 9.14,4.88 R5.1
P0.14
  Top 0.15: SW_ENT.2 C31.2 20.09,4.18 R8.1
P1.01  (via drill 0.15 pad 0.3)
  Top 0.15: U1.P$Y23 v38.02,17.34 | v8.01,8.72 | v8.01,8.72 Q1.1 6.5,8.72 5.93,8.15 R_PWR_EPD.1
  Bottom 0.15: v38.02,17.34 41.14,14.22 41.14,7.02 39.65,5.53 39,5.53 38.82,5.71 15.79,5.71 12.78,8.72 v8.01,8.72
P1.02  (via drill 0.15)
  Top 0.15: U1.P$W24 v38.97,18.02 | v32.57,4.95 32.57,4.11 SW_DN.2 C29.2 31.04,4.84 R7.1
  Bottom 0.15: v32.57,4.95 32.66,4.87 39.86,4.87 40.09,5.1 41.03,5.1 41.95,6.01 41.95,15.04 v38.97,18.02
PMIC_INT  (via drill 0.15)
  Top 0.15: IC1.A1 v26.55,12.33 v26.55,12.32 | v31.56,18.91 31.38,19.09 29.37,19.09 28.84,18.56 v28.84,16.34 | U1.P$T2 v32.53,18.37 v32.52,18.36 | v28.84,15.29 28.84,13.97 v28.41,13.54 v28.4,13.54
  Bottom 0.15: v32.52,18.36 31.97,18.91 v31.56,18.91 | v26.55,12.32 27.18,12.32 v28.4,13.54 | v28.84,16.34 v28.84,15.29
PREVGH
  Top 0.15: J1.21 11.54,13.25 12.07,13.78 EPD_C9.2 16.33,11.69 D5.1
PREVGL
  Top 0.15: J1.23 11.72,12.25 12.04,12.57 14.66,12.57 14.9,12.34 EPD_C11.2 14.91,12.12 14.91,10.77 13.33,9.19 D2.2
RESE  (via drill 0.15)
  Top 0.15: Q3.2 16.59,23.26 16.3,22.97 R1_EP_DR.2 v15.13,22.51 | v11.26,22.25 J1.3
  Bottom 0.15: v15.13,22.51 14.87,22.25 v11.26,22.25
RESET  (via drill 0.15)
  Top 0.15: TP_RESET.TP 5.53,30.12 10.12,30.12 10.66,29.57 J2.6 10.66,29.23 8.83,27.4 v8.83,17.02 v8.82,17.01 | v35.28,16.82 U1.P$AC13 | v35.28,14.67 v35.27,14.66 35.27,13.24 37.28,11.23 37.28,7.4 35.98,6.1 v33.65,6.1
  Bottom 0.15: v35.28,16.82 v35.28,14.67 | v33.65,6.1 16.33,6.1 8.82,13.61 v8.82,17.01
SCK  (via drill 0.15, 0.15 pad 0.3)
  Top 0.127: U1.P$A12
  Top 0.15: J1.13 9.86,17.25 v9.63,17.48 | v35.02,23.46 U1.P$A12
  Bottom 0.15: v35.02,23.46 32.88,25.61 30.91,25.61 29.2,27.31 18.43,27.31 16.54,25.43 13.7,25.43 9.63,21.36 v9.63,17.48
SCL  (via drill 0.15, 0.15 pad 0.3)
  Top 0.127: v42.99,13.97 42.99,13.42 U3.7
  Top 0.15: v39.46,5.89 v39.47,5.89 39.83,5.53 IC2.C1 40.35,4.75 v40.36,4.74 | IC1.B1 25.96,13.36 26.57,12.75 v26.98,12.75 v26.98,12.74 27.3,12.42 27.3,12.05 27.67,11.68 28.86,11.68 30.4,13.22 R4.1 | TP_SCL.TP 44.29,15.77 43.26,15.77 R17.2 43.11,14.97 43.31,14.78 43.31,13.38 43.17,13.24 U3.7 | v38.73,12.29 39.06,11.96 IC3.12 | v32.32,19.77 U1.P$M2 | v31.72,13.22 R4.1 | R4.1 | v39.06,11.06 IC3.12 | IC3.12
  Bottom 0.15: v42.99,13.97 42.81,14.15 42.56,14.15 42.33,13.91 42.33,5.76 41.12,4.55 40.55,4.55 v40.36,4.74 | v38.73,12.29 37.8,13.22 v31.72,13.22 | v32.32,19.77 28.58,19.77 27.24,18.43 27.24,13.01 v26.98,12.75 | v39.06,11.06 39.46,10.66 v39.46,5.89
SDA  (via drill 0.15, 0.15 pad 0.14, 0.15 pad 0.3)
  Top 0.15: v40.87,6.12 40.87,6.05 IC2.B2 | U1.P$L1 31.84,20.2 v28.53,20.2 v28.52,20.21 | v38.77,12.75 39.34,12.18 IC3.2 39.6,12.2 40.06,12.2 41.74,13.88 42.5,13.88 42.67,13.71 42.67,13.25 U3.8 41.83,13.24 v41.55,12.96 | R18.2 v41.53,9.4 | R18.2 41.55,9.9 42.94,8.51 42.94,7.23 TP_SDA.TP | v26.61,13.86 26,13.86 25.92,13.78 IC1.C1 25.96,13.76 26.54,13.19 R2.1 v29.26,13.19 v29.27,13.18 | v41.53,10.43 R18.2
  Bottom 0.15: v41.53,9.4 41.53,6.78 v40.87,6.12 | v38.77,12.75 37.93,13.59 29.68,13.59 v29.27,13.18 | v28.52,20.21 26.87,18.56 26.87,14.12 v26.61,13.86 | v41.55,12.96 41.55,10.45 v41.53,10.43
SWDCLK  (via drill 0.15 pad 0.3)
  Top 0.15: U1.P$AA24 39.12,17.52 43.52,21.92 TP_SWDCLK.TP 43.98,22.32 44.58,22.91 v44.58,23.2 | J2.4 12.86,28.64 v12.86,26.8
  Bottom 0.15: v12.86,26.8 13.54,26.12 16.21,26.12 17.98,27.89 29.86,27.89 31.38,26.37 42.84,26.37 44.58,24.63 v44.58,23.2
SWDIO  (via drill 0.15 pad 0.3)
  Top 0.15: U1.P$AC24 40.44,17.02 TP_SWDIO.TP 43.39,19.36 45.51,21.48 v45.51,22.8 | J2.2 13.87,29.56 14.14,29.29 v15.6,29.29
  Bottom 0.15: v15.6,29.29 v15.61,29.29 16.69,28.21 30.37,28.21 31.83,26.75 43.18,26.75 45.51,24.42 v45.51,22.8
SWO
  Top 0.15: TP_SWO.TP 42.41,18.09 41.01,16.68 38.41,16.68 38.21,16.88 37.74,16.88 37.53,16.67 U1.P$AD22
VBAT  (via drill 0.3)
  Top 0.203: IC1.C2 25.44,13.84 24.53,13.84 | 43.66,9.49 C27.2 U3.3
  Top 0.3: TP_VBAT.TP 44.4,8.76 43.66,9.49 | U3.3 U3.2 43.16,10.72 42.93,10.49 42.23,10.49 41.73,10.99 40.22,10.99 v39.01,9.78 | 24.53,13.84 24.07,13.84 23.43,13.21 C37.2 v23.43,9.71
  Bottom 0.3: v39.01,9.78 36.3,7.07 26.09,7.07 23.45,9.71 v23.43,9.71
VBUS  (via drill 0.3)
  Top 0.127: 20.62,28.88 J4.A9_B4
  Top 0.15: C43.1 C42.2 29.89,25.9
  Top 0.203: U1.P$AD2 32.53,15.85 32.5,15.82 | 25.52,12.54 IC1.A2 25.45,13.03 25.19,13.03
  Top 0.3: 20.62,28.88 20.62,29.56 21.77,30.71 24.23,30.71 25.4,29.54 J4.A4_B9 25.4,28.08 25.88,27.61 C43.1 | 29.89,25.9 29.25,25.26 D3.5 27.4,25.26 26.94,24.8 26.94,24.08 26.49,23.63 25.26,23.63 24.08,22.45 24.08,15.87 22.41,14.2 C38.2 22.41,12.71 v22.45,12.67 | 32.5,15.82 C21.1 32.49,14.55 32.49,13.16 30.52,11.19 26.87,11.19 25.52,12.54 | 25.19,13.03 24.49,12.33 24.12,12.33 v24.1,12.35
  Bottom 0.3: v22.45,12.67 22.78,12.34 v24.09,12.34 v24.1,12.35
VREG  (via drill 0.3)
  Top 0.203: IC1.B2 25.45,13.43 24.66,13.43 | 30.13,9.75 31.21,9.72 IC9.A1 IC9.A2 IC9.A3 32.03,9.74 32.47,10.18
  Top 0.3: C39.2 26.75,7.77 28.21,6.3 28.21,3.47 27.29,2.55 TP_VREG.TP | C39.2 v26.01,8.58 | C39.2 C24.2 28.5,8.56 29.69,9.75 30.13,9.75 | v24.45,13.19 24.45,13.22 24.66,13.43 | C23.2 32.48,10.19 32.47,10.18
  Bottom 0.3: v26.01,8.58 25.25,9.34 25.25,12.18 24.45,12.98 v24.45,13.19